# Altium PCB 400861.PcbDoc (part 2 of 7)
Units mm, origin at the board's own origin, x right, y up, seen from the top; angles counter-clockwise.
Board outline 145 x 63.5 mm, 8 copper layers (Top Side, Mid-Layer 1, Mid-Layer 2, Mid-Layer 3, Mid-Layer 4, Mid-Layer 5, Mid-Layer 6, Bottom Side), stack 1.529 mm thick; 287 components, 241 nets, 1164 pads, 3527 vias.
Unrouted connection lines stored in the file: 1.
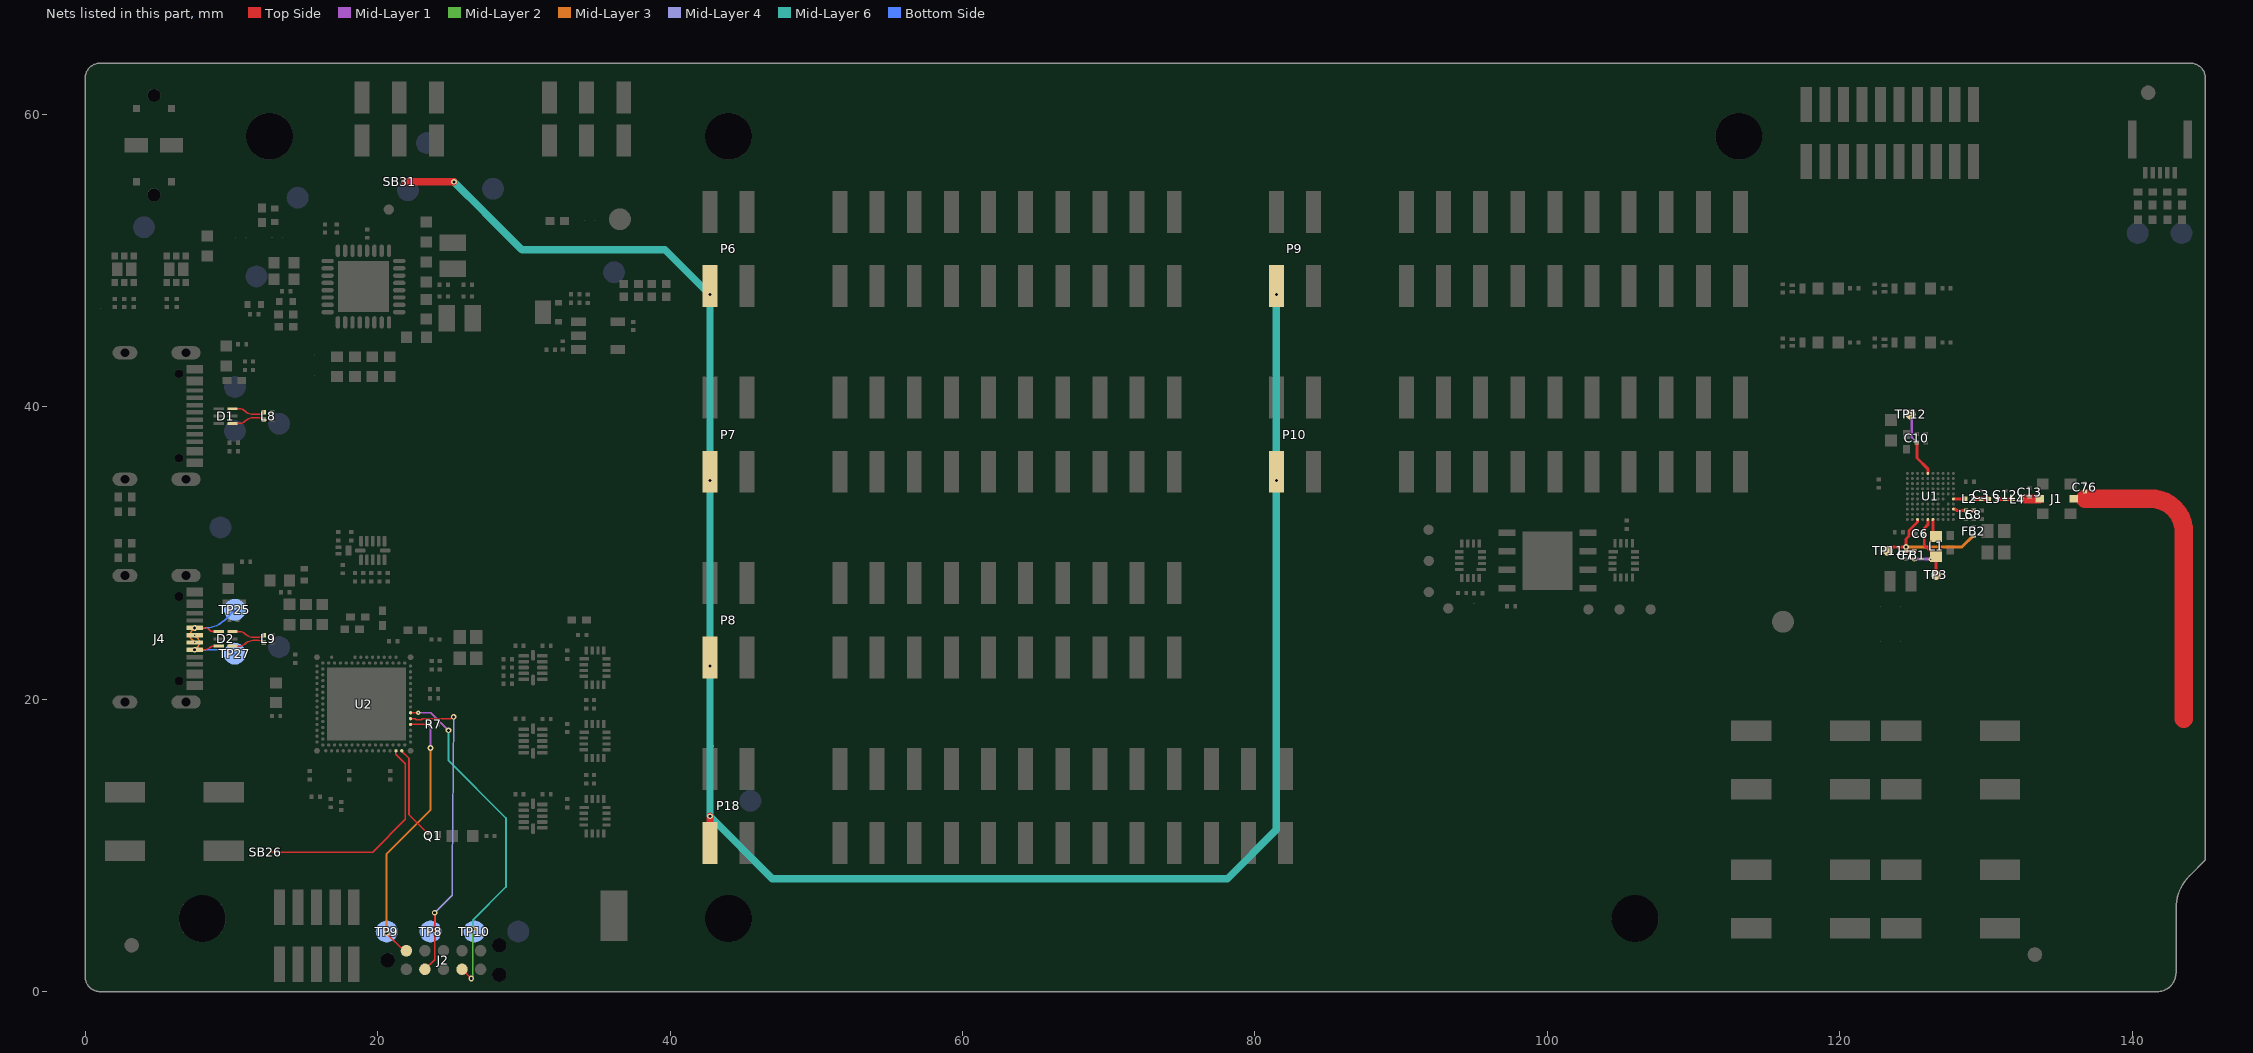
[diagram p8: the nets of this part, all layers, seen from the top]

## Footprints (in the part's own frame and the unit in brackets; to place one, negate y for a bottom-side part, rotate by r counter-clockwise, add the part's x,y. Pads: shape width x height; smd on the part's side, far side on the other; paste and mask are expansions set on the pad) (continued)
Solderbridge_Shorted_Power [mil]
  round 1 smd paste-99999: 1(-13.84,0.21) 2(13.72,0.21)
  Top Side region: -4.92,9.84 4.92,9.84 4.92,-9.84 -4.92,-9.84
  Top Side region: -7.54,19.57 -15.82,15.94 -21.61,9 -23.68,0.21 -23.68,0.21 -21.61,-8.59 -15.82,-15.53 -7.54,-19.16 -7.54,-19.16 -6.24,-19.11 -5.08,-18.51 -4.28,-17.47 -4,-16.2 -3.99,-16.2 -3.99,16.61 -4.28,17.89 -5.08,18.92 -6.24,19.52 -7.54,19.57
  Top Side region: 7.43,-19.16 15.71,-15.53 21.49,-8.59 23.56,0.21 23.56,0.21 21.49,9 15.71,15.94 7.43,19.57 7.43,19.57 6.12,19.52 4.96,18.92 4.16,17.89 3.88,16.61 3.88,16.61 3.88,-16.2 4.16,-17.47 4.96,-18.51 6.12,-19.11 7.43,-19.16
SON50P100X50-6N [mm] "SON, 6-Leads, Body 1,45x1,00mm, Pitch 0,50mm, IPC Medium Density"
  rect 0.7x0.2 smd: 1(-0.465,0.5) 2(-0.465,0) 3(-0.465,-0.5) 4(0.465,-0.5) 5(0.465,0) 6(0.465,0.5)
  silkscreen extent -0.95,-0.88 0.53,0.92, body extent -0.53,-0.75 0.53,0.75, height 0.5
SON127P600X80_HS-9N [mm] "SON, 8-Leads, Body 5.00x6.00mm, Pitch 1.27mm, Thermal Pad 4.00x3.40mm, IPC Medium Density"
  rect 1.15x0.45 smd: 1(-2.77,1.905) 2(-2.77,0.635) 3(-2.77,-0.635) 4(-2.77,-1.905) 5(2.77,-1.905) 6(2.77,-0.635) 7(2.77,0.635) 8(2.77,1.905)
  rect 3.4x4 smd paste-1.7: 9(0,0)
  silkscreen extent -3.98,-2.6 3.1,2.67, body extent -3.05,-2.55 3.05,2.55, height 0.8
SOT95P280X145-5N [mm] "SOT23, 5-Leads, Body 2,90x2,80mm, Pitch 0,95mm, IPC Medium Density"
  rect 1x0.6 smd: 1(-1.35,0.95) 2(-1.35,0) 3(-1.35,-0.95) 4(1.35,-0.95) 5(1.35,0.95)
  silkscreen extent -1.45,-1.5 0.45,1.72, body extent -1.5,-1.55 1.5,1.55, height 1.45
Switch-PB-6.2x6.3mm-SMD [mm] "6.2×6.5mm TACT Switch, without ground connector"
  rect 2.75x1.4 smd: 1(-3.375,2) 1(3.375,2) 2(-3.375,-2) 2(3.375,-2)
  silkscreen extent -3,-3 3,3, body extent -3.6,-3.1 3.6,3.1, height 2.5
TC2050-IDC-NLFP [mil]
  round 39 hole 39 unplated: 0(-150,0) 0(150,-40) 0(150,40)
  round 31 smd paste-196.85: 1(-100,-25) 2(-50,-25) 3(0,-25) 4(50,-25) 5(100,-25) 6(100,25) 7(50,25) 8(0,25) 9(-50,25) 10(-100,25)
  Top Side pour cut-out: -100,25 -100,-25 100,-25 100,25
TP_SMD_D0.7mm [mm] "Test point - pad 0.7mm"
  round 0.7 smd paste-5: 1(0,0)
TP_SMD_D1.5mm [mm] "Test point - pad 1.5mm"
  round 1.5 smd paste-5: 1(0,0)
  body extent -0.75,-0.75 0.75,0.75, height 0.05
WEE_3x4.5mm [mm]
  silkscreen extent -1.47,-2.7 1.47,1.71
XQFN40P180X260X50-16N [mm] "QFN, 16-Leads, Body 1.80x2.60mm, Pitch 0.40mm, IPC Medium Density"
  rect 0.65x0.22 smd paste-0.02 mask+0.05: 1(-0.725,0.6)
  rect 0.55x0.22 smd paste-0.02 mask+0.05: 2(-0.775,0.2) 3(-0.775,-0.2) 4(-0.775,-0.6) 9(0.775,-0.6) 10(0.775,-0.2) 11(0.775,0.2) 12(0.775,0.6)
  rect 0.22x0.55 smd paste-0.02 mask+0.05: 5(-0.6,-1.175) 6(-0.2,-1.175) 7(0.2,-1.175) 8(0.6,-1.175) 13(0.6,1.175) 14(0.2,1.175) 15(-0.2,1.175) 16(-0.6,1.175)
  silkscreen extent -1.36,1.12 -1.26,1.22, body extent -0.9,-1.3 0.9,1.3, height 0.55
XTAL_2012 [mm] "XTAL SMD 2.0 x 1.2 mm"
  rect 0.75x1.4 smd: 1(-0.725,0) 2(0.725,0)
  body extent -1,-0.61 1,0.61, height 0.6

## Part data
C1 C2 C5: library part C0201-100n-10V-X7R, "Capacitor, X7R, ±10%, 10V", Manufacturer=N.A., Part number NEMS=100200469, Artikkelnr Noca=N.A., Author=getr, Component Class=Capacitors, Component Status=Active, ComponentLink1Description=Datasheet, ComponentLink1URL=N.A., ComponentLink2Description="Supplier link", ComponentLink2URL=N.A., Footprint Doc=0201, HelpURL=N.A., LatestRevisionDate=2024-09-18, Manufacturer Part Number=N.A., Note=10V, Pad Count=2, Part Number=C0201-100n-10V-X7R, Part number IPS=N.A., Part number Norautron=N.A., PartId=100200469, Published=2021-04-12, Supplier 1=N.A., Supplier 2=N.A., Supplier Part Number 1=N.A., Supplier Part Number 2=N.A.
C3: library part C0201-1.2p-HQ-Murata, "Capacitor, NP0, ±0.05pF, 50V", Manufacturer=Murata, Manufacturer Part Number=GJM0335C1H1R2WB01D, Part number IPS=N.A., Part number NEMS=100200457, Supplier Part Number 1=490-GJM0335C1H1R2WB01DCT-ND, Artikkelnr Noca=N.A., Author=rsk, Component Class=Capacitors, Component Status=Active, ComponentLink1Description=Datasheet, ComponentLink1URL=https://search.murata.co.jp/Ceramy/image/img/A01X/G101/ENG/GJM0335C1H1R2WB01-01.pdf, ComponentLink2Description="Supplier link", ComponentLink2URL=https://www.murata.com/en-global/products/productdetail?partno=GJM0335C1H1R2WB01%23, Footprint Doc=0201, HelpURL=N.A., LatestRevisionDate=2020-12-16, Note=50V, Pad Count=2, Part Number=C0201-1.2p-HQ-Murata, Part number Norautron=N.A., PartId=100200457, Published=2020-12-16, Supplier 1=DigiKey, Supplier 2=Mouser, Supplier Part Number 2=81-GJM0335C1H1R2WB1D
C4: library part C0402-10µF-6.3V-X6S, "Capacitor, X6S, ±20%, 6.3V", Manufacturer=N.A., Part number NEMS=100200478, Artikkelnr Noca=N.A., Author=getr, Component Class=Capacitors, Component Status=Active, ComponentLink1Description=Datasheet, ComponentLink1URL=N.A., ComponentLink2Description="Supplier link", ComponentLink2URL=N.A., Footprint Doc=0402, HelpURL=N.A., LatestRevisionDate=2021-06-25, Manufacturer Part Number=N.A., Note=6.3V, Pad Count=2, Part Number=C0402-10µF-6.3V-X6S, Part number IPS=N.A., Part number Norautron=N.A., PartId=100200478, Published=2021-06-25, Supplier 1=N.A., Supplier 2=N.A., Supplier Part Number 1=N.A., Supplier Part Number 2=N.A.
C6: library part C0201-4.7µ-6V3-X5R-GRM035R60J475ME15J, "Capacitor, Ceramic, X5R, ±20%, 6.3V", Manufacturer=Murata, Manufacturer Part Number=GRM035R60J475ME15J, Part number IPS=N.A., Part number NEMS=100200685, Supplier Part Number 1=490-GRM035R60J475ME15JDKR-ND, Artikkelnr Noca=N.A., Author=rsk, Component Class=Capacitors, Component Status=Active, ComponentLink1Description=Datasheet, ComponentLink1URL=https://search.murata.co.jp/Ceramy/image/img/A01X/G101/ENG/GRM035R60J475ME15-01A.pdf, ComponentLink2Description="Supplier link", ComponentLink2URL=https://www.digikey.no/en/products/detail/murata-electronics/GRM035R60J475ME15J/10699045, Footprint Doc=0201, HelpURL=https://www.murata.com/en-eu/products/productdetail?partno=GRM035R60J475ME15J, LatestRevisionDate=2025-03-04, Note="-55°C ~ 85°C", Pad Count=2, Part Number=C0201-4.7µ-6V3-X5R-GRM035R60J475ME15J, Part number Norautron=N.A., PartId=100200685, Published=2025-03-04, Supplier 1=DigiKey, Supplier 2=Mouser, Supplier Part Number 2=81-GRM035R60J475ME5J
C7 C14: library part C0201-2µ2-2.5V-X6T-GRM033D80E225ME47D, "Capacitor, Ceramic, 2.2µF 2.5V X6T 0201,±20%", Manufacturer=Murata, Manufacturer Part Number=GRM033D80E225ME47D, Part number IPS=N.A., Part number NEMS=100200527, Supplier Part Number 1=81-GRM033D80E225ME7D, Artikkelnr Noca=N.A., Author=stl1, Component Class=Capacitors, Component Status=Active, ComponentLink1Description=Datasheet, ComponentLink1URL=https://www.murata.com/products/productdetail?partno=GRM033D80E225ME47%23, ComponentLink2Description="Supplier link", ComponentLink2URL=N.A., Footprint Doc=0201, HelpURL=N.A., LatestRevisionDate=2022-02-27, Note="2.5V, 20%, X6T", Pad Count=2, Part Number=C0201-2µ2-2.5V-X6T-GRM033D80E225ME47D, Part number Norautron=N.A., PartId=100200527, Published=2022-02-27, Supplier 1=Mouser, Supplier 2=DigiKey, Supplier Part Number 2=490-18653-1-ND
C8: library part C0201-1p0-25V-COG-GJM0335C1E1R0WB01, "CAP CER 1.0PF 25V C0G/NP0 0201", Manufacturer=Murata, Manufacturer Part Number=GJM0335C1E1R0WB01, Part number IPS=N.A., Part number NEMS=100200676, Supplier Part Number 1=490-10677-1-ND, Artikkelnr Noca=N.A., Author=masi, Component Class=Capacitors, Component Status=Active, ComponentLink1Description=Datasheet, ComponentLink1URL=https://search.murata.co.jp/Ceramy/image/img/A01X/G101/ENG/GJM0335C1E1R0WB01-01A.pdf, ComponentLink2Description="Supplier link", ComponentLink2URL=https://www.digikey.no/en/products/detail/murata-electronics/GRM0335C1E101JA01D/702426?s=N4IgTCBcDaICwE4AMBaAzARgGyqygcgCIgC6AvkA, Footprint Doc=0201, HelpURL=N.A., LatestRevisionDate=2024-10-17, Note=25V, Pad Count=2, Part Number=C0201-1p0-25V-COG-GJM0335C1E1R0WB01, Part number Norautron=N.A., PartId=100200676, Published=2024-10-17, Supplier 1=DigiKey, Supplier 2=Mouser, Supplier Part Number 2=81-GJM0335C1E1R0WB01
C10: library part C0201-2µ2-10V-X5R-GRM033R61A225KE47, "Capacitor, Ceramic, 2.2µF 10V X5R 0201,±10%", Manufacturer=Murata, Manufacturer Part Number=GRM033R61A225KE47D, Part number IPS=N.A., Part number NEMS=100200496, Supplier Part Number 1=81-GRM033R61A225KE7D, Artikkelnr Noca=N.A., Author=prbu, Component Class=Capacitors, Component Status=Active, ComponentLink1Description=Datasheet, ComponentLink1URL=https://www.murata.com/en-sg/products/productdetail?partno=GRM033R61A225KE47%23, ComponentLink2Description="Supplier link", ComponentLink2URL=https://www.mouser.com/ProductDetail/Murata-Electronics/GRM033R61A225KE47D?qs=I53XXhTNm8tqgHaFsI1bug%3D%3D, Footprint Doc=0201, HelpURL=N.A., LatestRevisionDate=2021-12-09, Note=10V, Pad Count=2, Part Number=C0201-2µ2-10V-X5R-GRM033R61A225KE47, Part number Norautron=N.A., PartId=100200496, Published=2021-12-09, Supplier 1=Mouser, Supplier 2=Digi-Key, Supplier Part Number 2=490-13227-1-ND
C11: library part C0402-4µ7-10V-X5R, "Capacitor, X5R, 10V", Manufacturer=Murata, Manufacturer Part Number=GRM155R61A475MEAAD, Part number IPS=N.A., Part number NEMS=100200415, Supplier Part Number 1=490-14306-1-ND, Artikkelnr Noca=N.A., Author=rsk, Component Class=Capacitors, Component Status=Active, ComponentLink1Description=Datasheet, ComponentLink1URL=http://search.murata.co.jp/Ceramy/image/img/A01X/G101/ENG/GRM155R61A475MEAA-01.pdf, ComponentLink2Description="Supplier link", ComponentLink2URL=https://www.digikey.com/product-detail/en/murata-electronics-north-america/GRM155R61A475MEAAD/490-14306-1-ND/6234742, Footprint Doc=0402, HelpURL=https://psearch.en.murata.com/capacitor/product/GRM155R61A475MEAA%23.html, LatestRevisionDate=2020-10-13, Note=10V, Pad Count=2, Part Number=C0402-4µ7-10V-X5R, Part number Norautron=N.A., PartId=100200415, Published=2018-10-04, Supplier 1=Digi-Key, Supplier 2=N.A., Supplier Part Number 2=N.A.
C12: library part C0201-1.5p-25V-NP0-GJM0335C1E1R5WB01, "Capacitor, NP0, ±0.05pF, 25V, High Q", Manufacturer=Murata, Manufacturer Part Number=GJM0335C1E1R5WB01, Part number IPS=N.A., Part number NEMS=100200477, Supplier Part Number 1=490-11176-2-ND, Artikkelnr Noca=N.A., Author=masi, Component Class=Capacitors, Component Status=Active, ComponentLink1Description=Datasheet, ComponentLink1URL=https://search.murata.co.jp/Ceramy/image/img/A01X/G101/ENG/GJM0335C1E1R5WB01-01.pdf, ComponentLink2Description="Supplier link", ComponentLink2URL=N.A., Footprint Doc=0201, HelpURL=https://www.murata.com/products/productdetail?partno=GJM0335C1E1R5WB01%23, LatestRevisionDate=2021-06-15, Note=25V, Pad Count=2, Part Number=C0201-1.5p-25V-NP0-GJM0335C1E1R5WB01, Part number Norautron=N.A., PartId=100200477, Published=2021-06-15, Supplier 1=DigiKey, Supplier 2=Mouser, Supplier Part Number 2=81-GJM0335C1E1R5WB1D
C13: library part C0201-0.3p-50V-GRM0335C1HR30BA01, "Capacitor, C0G, ±0.1pF, 50V", Manufacturer=Murata, Manufacturer Part Number=GRM0335C1HR30BA01, Part number IPS=N.A., Part number NEMS=100200650, Supplier Part Number 1=490-6135-2-ND, Artikkelnr Noca=N.A., Author=masi, Component Class=Capacitors, Component Status=Active, ComponentLink1Description=Datasheet, ComponentLink1URL=https://www.murata.com/en-global/products/productdetail?partno=GRM0335C1HR30BA01%23, ComponentLink2Description="Supplier link", ComponentLink2URL=N.A., Footprint Doc=0201, HelpURL=N.A., LatestRevisionDate=2024-01-10, Note=50V, Pad Count=2, Part Number=C0201-0.3p-50V-GRM0335C1HR30BA01, Part number Norautron=N.A., PartId=100200650, Published=2024-01-10, Supplier 1=DigiKey, Supplier 2=Mouser, Supplier Part Number 2=81-GRM0335C1HR30BA1D
C15 C16 C17 C21 C22 C23 C24 C28 C31 C35 C37 C47 C49 C54 C58 C63 C66 C69 C72 C77: library part C0201-100n, "Capacitor, X5R, ±10%, 100nF, 16V", Manufacturer=N.A., Part number IPS="00000001248, 00000002505", Part number NEMS=100200078, Part number Norautron=262071862, Artikkelnr Noca=N.A., Author=rsk, Component Class=Capacitors, Component Status=Active, ComponentLink1Description=Datasheet, ComponentLink1URL=N.A., ComponentLink2Description="Supplier link", ComponentLink2URL=N.A., Footprint Doc=0201, HelpURL=N.A., LatestRevisionDate=2024-06-27, Manufacturer Part Number=N.A., Note=16V, Pad Count=2, Part Number=C0201-100n, PartId=100200078, Published=2014-11-13, Supplier 1=N.A., Supplier 2=N.A., Supplier Part Number 1=N.A., Supplier Part Number 2=N.A.
C18 C19 C25 C32 C87: library part C0402-1µ0-6.3V-X5R-10%, "Capacitor, X5R, ±10%, 6.3V", Manufacturer=N.A., Part number NEMS=100200498, Part number Norautron=26207137, Artikkelnr Noca=N.A., Author=rubr, Component Class=Capacitors, Component Status=Active, ComponentLink1Description=Datasheet, ComponentLink1URL=N.A., ComponentLink2Description="Supplier link", ComponentLink2URL=N.A., Footprint Doc=0402, HelpURL=N.A., LatestRevisionDate=2022-01-27, Manufacturer Part Number=N.A., Note=6.3V, Pad Count=2, Part Number=C0402-1µ0-6.3V-X5R-10%, Part number IPS=N.A., PartId=100200498, Published=2022-01-27, Supplier 1=N.A., Supplier 2=N.A., Supplier Part Number 1=N.A., Supplier Part Number 2=N.A.
C20: library part C0201-2n2, "Capacitor, X7R, ±10%, 10V", Manufacturer=N.A., Part number IPS=00000001778, Part number NEMS=100200060, Part number Norautron=26470002, Artikkelnr Noca=N.A., Author=rsk, Component Class=Capacitors, Component Status=Active, ComponentLink1Description=Datasheet, ComponentLink1URL=N.A., ComponentLink2Description="Supplier link", ComponentLink2URL=N.A., Footprint Doc=0201, HelpURL=N.A., LatestRevisionDate=2014-11-13, Manufacturer Part Number=N.A., Note=10V, Pad Count=2, Part Number=C0201-2n2, PartId=100200060, Published=2014-11-13, Supplier 1=N.A., Supplier 2=N.A., Supplier Part Number 1=N.A., Supplier Part Number 2=N.A.
C26: library part C0603-2µ2-6.3V-X7R, "Capacitor, X7R, ±10%, 2.2µF, 6.3V", Manufacturer=N.A., Part number NEMS=100200272, Artikkelnr Noca=20039322, Author=rsk, Component Class=Capacitors, Component Status=Active, ComponentLink1Description=Datasheet, ComponentLink1URL=N.A., ComponentLink2Description="Supplier link", ComponentLink2URL=N.A., Footprint Doc=0603, HelpURL=N.A., LatestRevisionDate=2024-06-27, Manufacturer Part Number=N.A., Note=6.3V, Pad Count=2, Part Number=C0603-2µ2-6.3V-X7R, Part number IPS=N.A., Part number Norautron=N.A., PartId=100200272, Published=2009-05-08, Supplier 1=N.A., Supplier 2=N.A., Supplier Part Number 1=N.A., Supplier Part Number 2=N.A.
C27 C29: library part C0603-4µ7-10V-X7S, "Capacitor, X7S, ±10%, 10V", Manufacturer=N.A., Part number IPS=00000001779, Part number NEMS=100200351, Supplier Part Number 1=445-14258-1-ND, Artikkelnr Noca=20030013, Author=rsk, Component Class=Capacitors, Component Status=Active, ComponentLink1Description=Datasheet, ComponentLink1URL=N.A., ComponentLink2Description="Supplier link", ComponentLink2URL=N.A., Footprint Doc=0603, HelpURL=N.A., LatestRevisionDate=2016-08-15, Manufacturer Part Number=N.A., Note=10V, Pad Count=2, Part Number=C0603-4µ7-10V-X7S, Part number Norautron=N.A., PartId=100200351, Published=2016-08-15, Supplier 1=Digi-Key, Supplier 2=N.A., Supplier Part Number 2=N.A.
C30: library part C0603-4µ7-6.3V-X7R, "Capacitor, X7R, ±10%, 6.3V", Manufacturer="Samsung Electro-Mechanics America", Manufacturer Part Number=CL10B475KQ8NQNC, Part number IPS=00000002541, Part number NEMS=100200350, Part number Norautron=N.A., Supplier Part Number 1=1276-2087-1-ND, Artikkelnr Noca=20039473, Author=rsk, Component Class=Capacitors, Component Status=Active, ComponentLink1Description=Datasheet, ComponentLink1URL=N.A., ComponentLink2Description="Supplier link", ComponentLink2URL=N.A., Footprint Doc=0603, HelpURL=http://media.digikey.com/pdf/Data%20Sheets/Samsung%20PDFs/CL10B475KQ8NQNC_Spec.pdf, LatestRevisionDate=2015-06-10, Note=6.3V, Pad Count=2, Part Number=C0603-4µ7-6.3V-X7R, PartId=100200350, Published=2015-06-10, Supplier 1=Digi-Key, Supplier 2=N.A., Supplier Part Number 2=N.A.
C33 C50 C51 C52: library part C0603-10µ-10V-X5R, "Capacitor, Ceramic, X5R, ±20%, 10V", Manufacturer=N.A., Part number NEMS=100200481, Part number Norautron=262085341, Artikkelnr Noca=N.A., Author=rubr, Component Class=Capacitors, Component Status=Active, ComponentLink1Description=Datasheet, ComponentLink1URL=N.A., ComponentLink2Description="Supplier link", ComponentLink2URL=N.A., Footprint Doc=0603, HelpURL=N.A., LatestRevisionDate=2021-07-22, Manufacturer Part Number=N.A., Note=10V, Pad Count=2, Part Number=C0603-10µ-10V-X5R, Part number IPS=N.A., PartId=100200481, Published=2021-07-22, Supplier 1=N.A., Supplier 2=N.A., Supplier Part Number 1=N.A., Supplier Part Number 2=N.A.
C34 C36 C38: library part C0402-4µ7-10V-X5R-GRM155R61A475MEAAD, "Capacitor, X5R, ±20%, 10V", Manufacturer=Murata, Manufacturer Part Number=GRM155R61A475MEAA, Part number IPS=N.A., Part number NEMS="100200549, 100200415", Supplier Part Number 1=490-14306-1-ND, Artikkelnr Noca=N.A., Author=rubr, Component Class=Capacitors, Component Status=Active, ComponentLink1Description=Datasheet, ComponentLink1URL=https://search.murata.co.jp/Ceramy/image/img/A01X/G101/ENG/GRM155R61A475MEAA-01.pdf, ComponentLink2Description="Supplier link", ComponentLink2URL=N.A., Footprint Doc=0402, HelpURL=https://www.murata.com/en-us/products/productdetail?partno=GRM155R61A475MEAA%23, LatestRevisionDate=2023-03-22, Note=10V, Pad Count=2, Part Number=C0402-4µ7-10V-X5R-GRM155R61A475MEAAD, Part number Norautron=N.A., PartId=100200549, Published=2023-03-22, Supplier 1=Digi-Key, Supplier 2=N.A., Supplier Part Number 2=N.A.
C39: library part C0402-1µ0-10V-X5R, "Capacitor, Ceramic, X5R, ±10%, 10V", Manufacturer=N.A., Part number NEMS=100200482, Artikkelnr Noca=N.A., Author=rubr, Component Class=Capacitors, Component Status=Active, ComponentLink1Description=Datasheet, ComponentLink1URL=N.A., ComponentLink2Description="Supplier link", ComponentLink2URL=N.A., Footprint Doc=0402, HelpURL=N.A., LatestRevisionDate=2021-07-22, Manufacturer Part Number=N.A., Note=10V, Pad Count=2, Part Number=C0402-1µ0-10V-X5R, Part number IPS=N.A., Part number Norautron=N.A., PartId=100200482, Published=2021-07-22, Supplier 1=N.A., Supplier 2=N.A., Supplier Part Number 1=N.A., Supplier Part Number 2=N.A.
C40 C41 C44 C45 C46 C48: library part C0603-10µ-10V-X7T-GRM188D71A106MA73, "Capacitor, X7T, ±20%, 10V", Manufacturer=Murata, Manufacturer Part Number=GRM188D71A106MA73D, Part number IPS=00000004696, Part number NEMS=100200414, Part number Norautron=N.A., Supplier Part Number 1=490-7200-1-ND, Artikkelnr Noca=N.A., Author=rsk, Component Class=Capacitors, Component Status=Active, ComponentLink1Description=Datasheet, ComponentLink1URL=N.A., ComponentLink2Description="Supplier link", ComponentLink2URL=N.A., Footprint Doc=0603, HelpURL=https://no.mouser.com/datasheet/2/281/murata_03052018_GRM_Series_1-1310166.pdf, LatestRevisionDate=2021-07-22, Note=10VDC, Pad Count=2, Part Number=C0603-10µ-10V-X7T-GRM188D71A106MA73, PartId=100200414, Published=2018-09-11, Supplier 1=Digi-Key, Supplier 2=Mouser, Supplier Part Number 2=81-GRM188D71A106MA3D
C42 C43: library part C0201-1n0, "Capacitor, X7R, ±10%, 25V", Manufacturer=N.A., Part number IPS=00000003206, Part number NEMS=100200056, Artikkelnr Noca=N.A., Author=rsk, Component Class=Capacitors, Component Status=Active, ComponentLink1Description=Datasheet, ComponentLink1URL=N.A., ComponentLink2Description="Supplier link", ComponentLink2URL=N.A., Footprint Doc=0201, HelpURL=N.A., LatestRevisionDate=2020-10-13, Manufacturer Part Number=N.A., Note=16V, Pad Count=2, Part Number=C0201-1n0, Part number Norautron=N.A., PartId=100200056, Published=2014-11-13, Supplier 1=N.A., Supplier 2=N.A., Supplier Part Number 1=N.A., Supplier Part Number 2=N.A.
C55: library part C0603-4µ7-25V-X5R, "Capacitor, X5R, ±10%, 25V", Manufacturer=Murata, Manufacturer Part Number=GRM188R61E475KE11D, Part number IPS=N.A., Part number NEMS=100200352, Supplier Part Number 1=490-7203-1-ND, Artikkelnr Noca=N.A., Author=rsk, Component Class=Capacitors, Component Status=Active, ComponentLink1Description=Datasheet, ComponentLink1URL=https://www.murata.com/~/media/webrenewal/support/library/catalog/products/capacitor/mlcc/c02e.ashx?la=en-us, ComponentLink2Description="Supplier link", ComponentLink2URL=https://www.digikey.com/product-detail/en/murata-electronics-north-america/GRM188R61E475KE11D/490-7203-1-ND/3900450, Footprint Doc=0603, HelpURL=https://www.murata.com/~/media/webrenewal/support/library/catalog/products/capacitor/mlcc/c02e.ashx?la=en-us, LatestRevisionDate=2019-06-11, Note=25V, Pad Count=2, Part Number=C0603-4µ7-25V-X5R, Part number Norautron=N.A., PartId=100200352, Published=2019-06-11, Supplier 1=Digi-Key, Supplier 2=N.A., Supplier Part Number 2=N.A.
C56 C57: library part C0402-300p, "Capacitor, C0G, ±5%, 50V", Manufacturer=N.A., Part number IPS=00000007788, Part number NEMS=100200155, Supplier Part Number 1=490-3234-1-ND, Artikkelnr Noca=20020004, Author=rsk, Component Class=Capacitors, Component Status=Active, ComponentLink1Description=Datasheet, ComponentLink1URL=N.A., ComponentLink2Description="Supplier link", ComponentLink2URL=N.A., Footprint Doc=0402, HelpURL=N.A., LatestRevisionDate=2020-10-13, Manufacturer Part Number=N.A., Note=50V, Pad Count=2, Part Number=C0402-300p, Part number Norautron=N.A., PartId=100200155, Published=2015-05-29, Supplier 1=Digi-Key, Supplier 2=N.A., Supplier Part Number 2=N.A.
C59 C60 C61 C62 C78 C79 C80 C81 C82 C83 C84 C85 C86 C88 C89: library part C0201-100n, "Capacitor, X5R, ±10%", Manufacturer=N.A., Part number IPS="00000001248, 00000002505", Part number NEMS=100200078, Part number Norautron=262071862, Artikkelnr Noca=N.A., Author=rsk, Component Class=Capacitors, Component Status=Active, ComponentLink1Description=Datasheet, ComponentLink1URL=N.A., ComponentLink2Description="Supplier link", ComponentLink2URL=N.A., Footprint Doc=0201, HelpURL=N.A., LatestRevisionDate=2017-11-09, Manufacturer Part Number=N.A., Note=16V, Pad Count=2, Part Number=C0201-100n, PartId=100200078, Published=2014-11-13, Supplier 1=N.A., Supplier 2=N.A., Supplier Part Number 1=N.A., Supplier Part Number 2=N.A.
C64 C70: library part C0402-1µ0-16V-X5R, "Capacitor, Ceramic, X5R, ±10%, 16V", Manufacturer=Murata, Manufacturer Part Number=GRT155R61C105KE01D, Part number IPS=N.A., Part number NEMS=100200452, Supplier Part Number 1=490-12255-1-ND, Artikkelnr Noca=N.A., Author=rsk, Component Class=Capacitors, Component Status=Active, ComponentLink1Description=Datasheet, ComponentLink1URL=https://search.murata.co.jp/Ceramy/image/img/A01X/G101/ENG/GRT155R61C105KE01-01.pdf, ComponentLink2Description="Supplier link", ComponentLink2URL=https://www.murata.com/en-global/products/productdetail?partno=GRT155R61C105KE01%23, Footprint Doc=0402, HelpURL=N.A., LatestRevisionDate=2020-12-15, Note=16V, Pad Count=2, Part Number=C0402-1µ0-16V-X5R, Part number Norautron=N.A., PartId=100200452, Published=2020-12-15, Supplier 1=Digi-Key, Supplier 2=Mouser, Supplier Part Number 2=81-GRT155R61C105KE1D
C65 C71: library part C0201-10n, "Capacitor, X7R, ±10%, 10nF, 10V", Manufacturer=N.A., Part number IPS=00000003480, Part number NEMS=100200067, Part number Norautron=26621779, Artikkelnr Noca=N.A., Author=rsk, Component Class=Capacitors, Component Status=Active, ComponentLink1Description=Datasheet, ComponentLink1URL=N.A., ComponentLink2Description="Supplier link", ComponentLink2URL=N.A., Footprint Doc=0201, HelpURL=N.A., LatestRevisionDate=2024-06-27, Manufacturer Part Number=N.A., Note=10V, Pad Count=2, Part Number=C0201-10n, PartId=100200067, Published=2014-11-13, Supplier 1=N.A., Supplier 2=N.A., Supplier Part Number 1=N.A., Supplier Part Number 2=N.A.
C67 C68 C73 C74: library part C0402-10n, "Capacitor, X7R, ±10%", Manufacturer=N.A., Part number IPS=00000007784, Part number NEMS=100200173, Artikkelnr Noca=20039166, Author=rsk, Component Class=Capacitors, Component Status=Active, ComponentLink1Description=Datasheet, ComponentLink1URL=N.A., ComponentLink2Description="Supplier link", ComponentLink2URL=N.A., Footprint Doc=0402, HelpURL=N.A., LatestRevisionDate=2009-11-23, Manufacturer Part Number=N.A., Note=16V, Pad Count=2, Part Number=C0402-10n, Part number Norautron=N.A., PartId=100200173, Published=2009-05-08, Supplier 1=N.A., Supplier 2=N.A., Supplier Part Number 1=N.A., Supplier Part Number 2=N.A.
C76: library part C0201-1.0p_RF, "RF Chip Cap 0201", Manufacturer=N.A., Part number NEMS=100200085, Artikkelnr Noca=N.A., Author=rsk, Component Class=Capacitors, Component Status=Active, ComponentLink1Description=Datasheet, ComponentLink1URL=N.A., ComponentLink2Description="Supplier link", ComponentLink2URL=N.A., Footprint Doc=0201, HelpURL=N.A., LatestRevisionDate=2016-04-22, Manufacturer Part Number=N.A., Note="High frequency chip capasitors ±5%, NP0", Pad Count=2, Part Number=C0201-1.0p_RF, Part number IPS=N.A., Part number Norautron=N.A., PartId=100200085, Published=2016-04-22, Supplier 1=N.A., Supplier 2=N.A., Supplier Part Number 1=N.A., Supplier Part Number 2=N.A.
D1 D2: "TVS DIODE 5.5VWM 6XSON", Manufacturer=Nexperia, Part number IPS=N.A., Part number NEMS=101300202, Supplier Part Number 1=1727-4161-1-ND, Artikkelnr Noca=N.A., Author=rsk, Component Class=Semiconductors, Component Status=Active, ComponentLink1Description=Datasheet, ComponentLink1URL=https://assets.nexperia.com/documents/data-sheet/PRTR5V0U2F_PRTR5V0U2K.pdf, ComponentLink2Description="Supplier link", ComponentLink2URL=https://www.digikey.com/en/products/detail/nexperia-usa-inc/PRTR5V0U2F-115/1992982, Footprint Doc=SOT886, HelpURL=https://www.nexperia.com/products/esd-protection-tvs-filtering-and-signal-conditioning/automotive-esd-protection-and-tvs/automotive-esd-protection/PRTR5V0U2F.html, LatestRevisionDate=2023-02-19, Manufacturer Part Number=PRTR5V0U2F,115, Note=N.A., Pad Count=6, Part Number=PRTR5V0U2F,115, Part number Norautron=N.A., PartId=101300202, Published=2023-02-19, Supplier 1=DigiKey, Supplier 2=Mouser, Supplier Part Number 2=771-PRTR5V0U2F-T/R
FB1: library part FB0201-120R@100M-200mA-BLM03AG121SN1D, "Ferrite Bead, 120 Ohm @ 100MHz, 200mA, 500 mOhm Max", Manufacturer=Murata, Manufacturer Part Number=BLM03AG121SN1D, Part number IPS=N.A., Part number NEMS=100300419, Supplier Part Number 1=490-5622-1-ND, Artikkelnr Noca=N.A., Author=stl1, Component Class=Inductors, Component Status=Active, ComponentLink1Description=Datasheet, ComponentLink1URL=https://www.murata.com/en-eu/products/productdetail?partno=BLM03AG121SN1%23, ComponentLink2Description="Supplier link", ComponentLink2URL=N.A., Footprint Doc=0201, HelpURL=N.A., LatestRevisionDate=2022-02-27, Note="Ferrite Bead", Pad Count=2, Part Number=FB0201-120R@100M-200mA-BLM03AG121SN1D, Part number Norautron=N.A., PartId=100300419, Published=2022-02-27, Supplier 1=Digi-Key, Supplier 2=Mouser, Supplier Part Number 2=81-BLM03AX121SN1D
FB2: library part L0201-15n, "Inductor, 250mA, ±5%", Manufacturer=Murata, Manufacturer Part Number=LQP03TN15NJ02D, Part number IPS=N.A., Part number NEMS=100300032, Supplier Part Number 1=490-5570-1-ND, Artikkelnr Noca=N.A., Author=rsk, Component Class=Inductors, Component Status=Active, ComponentLink1Description=Datasheet, ComponentLink1URL=http://search.murata.co.jp/Ceramy/image/img/P02/JELF243C-0015.pdf, ComponentLink2Description="Supplier link", ComponentLink2URL=N.A., Footprint Doc=0201, HelpURL=N.A., LatestRevisionDate=2013-04-10, Note="High frequency chip inductor ±10%", Pad Count=2, Part Number=L0201-15n, Part number Norautron=N.A., PartId=100300032, Published=2013-04-10, Supplier 1=DigiKey, Supplier 2=N.A., Supplier Part Number 2=N.A.
FB3 FB4: library part FB0603-120R@100MHz-3000mA, "Ferrite Bead, 120 Ohm @ 100MHz, 3000mA, 30 mOhm Max", Manufacturer=Murata, Manufacturer Part Number=BLM18KG121TN1D, Part number IPS=N.A., Part number NEMS=100300103, Supplier Part Number 1=490-5254-1-ND, Artikkelnr Noca=N.A., Author=rsk, Component Class=Inductors, Component Status=Active, ComponentLink1Description=Datasheet, ComponentLink1URL=N.A., ComponentLink2Description="Supplier link", ComponentLink2URL=http://www.murata.com/en-global/products/productdata/8796733767710/S0580E.pdf, Footprint Doc=0603, HelpURL=http://www.murata.com/en-global/products/productdata/8796733767710/S0580E.pdf, LatestRevisionDate=2017-08-15, Note="Chip EMIFIL Inductor Type Chip Ferrite Bead", Pad Count=2, Part Number=FB0603-120R@100MHz-3000mA, Part number Norautron=N.A., PartId=100300103, Published=2017-08-15, Supplier 1=Digi-Key, Supplier 2=N.A., Supplier Part Number 2=N.A.
FB5: library part FB0402-120R@100MHz-1200mA-BLM15EX121SN1_C2, "Ferrite Bead, 120 Ohm @ 100MHz, 1200mA, 75 mOhm Max", Manufacturer=Murata, Manufacturer Part Number=BLM15EX121SN1, Part number IPS=N.A., Part number NEMS="100300431, 100300416", Supplier Part Number 1=490-16509-1-ND, Artikkelnr Noca=N.A., Author=rubr, Component Class=Inductors, Component Status=Active, ComponentLink1Description=Datasheet, ComponentLink1URL=https://www.murata.com/en-us/products/productdata/8796750970910/ENFA0023.pdf, ComponentLink2Description="Supplier link", ComponentLink2URL=N.A., Footprint Doc=0402, HelpURL=https://www.murata.com/en-us/products/productdetail?partno=BLM15EX121SN1%23, LatestRevisionDate=2023-03-22, Note=N.A., Pad Count=2, Part Number=FB0402-120R@100MHz-1200mA-BLM15EX121SN1_C2, Part number Norautron=N.A., PartId=100300431, Published=2023-03-22, Supplier 1=Digi-Key, Supplier 2=Mouser, Supplier Part Number 2=81-BLM15EX121SN1D
Fid1 Fid2 Fid3: library part Fid-Mark, "Fiducial Mark", Manufacturer=N.A., Part number NEMS=100500073, Artikkelnr Noca=N.A., Author=rsk, Component Class=Connectors, Component Status=Active, ComponentLink1Description=Datasheet, ComponentLink1URL=N.A., ComponentLink2Description="Supplier link", ComponentLink2URL=N.A., Footprint Doc=Fiducial, HelpURL=N.A., LatestRevisionDate=2009-12-12, Manufacturer Part Number=N.A., Note=N.A., Pad Count=1, Part Number=Fid-Mark, Part number IPS=N.A., Part number Norautron=N.A., PartId=100500073, Published=2009-12-12, Supplier 1=N.A., Supplier 2=N.A., Supplier Part Number 1=N.A., Supplier Part Number 2=N.A., System=Connector
H1 H2 H3 H4 H5 H6: library part MountingHole_3.2_M3, "Mounting hole, 3.2mm, M3, no annular", Manufacturer=N.A., Part number NEMS=101200008, Artikkelnr Noca=N.A., Author=kod1, Component Class=Mechanicals, Component Status=Active, ComponentLink1Description=Datasheet, ComponentLink1URL=N.A., ComponentLink2Description="Supplier link", ComponentLink2URL=N.A., Footprint Doc=MountingHole_3.2_M3, HelpURL=N.A., LatestRevisionDate=2022-12-16, Manufacturer Part Number=N.A., Note=N.A., Pad Count=0, Part Number=MountingHole_3.2_M3, Part number IPS=N.A., Part number Norautron=N.A., PartId=101200008, Published=2022-12-16, Rule="Clearance Constraint [Generic clearance = 0.254mm, and 9 value(s) for objects]", Supplier 1=N.A., Supplier 2=N.A., Supplier Part Number 1=N.A., Supplier Part Number 2=N.A.
J1: "Coaxial Connector with Switch", Manufacturer=Murata, Part number IPS=00000009955, Part number NEMS=100500400, Part number Norautron=26030338, Supplier Part Number 1=490-4981-1-ND, Artikkelnr Noca=55029011, Author=rsk, Component Class=Connectors, Component Status=Active, ComponentLink1Description=Datasheet, ComponentLink1URL=N.A., ComponentLink2Description="Supplier link", ComponentLink2URL=N.A., Footprint Doc=COAXIAL-SWF, HelpURL=http://www.murata.com/products/catalog/pdf/o33e.pdf, LatestRevisionDate=2014-04-24, Manufacturer Part Number=MM8130-2600, Note=N.A., Pad Count=3, Part Number=MM8130-2600, PartId=100500400, Published=2014-04-24, Supplier 1=Digi-Key, Supplier 2=Mouser, Supplier Part Number 2=81-MM8130-2600RA2, System=Connector
J2: library part TC2050-IDC-NLFP, "CBL PLUG-OF-NAILS 10-PIN", Manufacturer="Tag-Connect LLC", Part number IPS=N.A., Part number NEMS=100500463, Supplier Part Number 1=TC2050-IDC-NL-ND, Artikkelnr Noca=N.A., Author=rsk, Component Class=Connectors, Component Status=Active, ComponentLink1Description=Datasheet, ComponentLink1URL=N.A., ComponentLink2Description="Supplier link", ComponentLink2URL=N.A., Footprint Doc=TC2050-IDC-NLFP, HelpURL=http://www.tag-connect.com/Materials/TC2050-IDC%20Datasheet.pdf, LatestRevisionDate=2012-11-21, Manufacturer Part Number=TC2050-IDC-NLFP, Note=N.A., Pad Count=10, Part Number=TC2050-IDC-NLFP, Part number Norautron=N.A., PartId=100500463, Published=2012-11-21, Supplier 1=Digi-Key, Supplier 2=N.A., Supplier Part Number 2=N.A., System=Connector
J3 J4: library part 80259-1021, "USB-C Receptacle, 16 Pin, USB 2.0", Manufacturer="Bellweather Electronic Corp.", Part number IPS=N.A., Part number NEMS=100500830, Artikkelnr Noca=N.A., Author=getr, Component Class=Connectors, Component Status=Active, ComponentLink1Description=Datasheet, ComponentLink1URL=\\hizz\pro\app9717\Datasheet\connectors\Bellwether\SD-80259-001_C.pdf, ComponentLink2Description="Supplier link", ComponentLink2URL=N.A., Footprint Doc=SD-80259-001, HelpURL=N.A., LatestRevisionDate=2024-03-26, Manufacturer Part Number=80259-1021, Note=N.A., Pad Count=16, Part Number=80259-1021, Part number Norautron=N.A., PartId=100500830, Published=2023-10-30, Supplier 1=Cabcon, Supplier 2=N.A., Supplier Part Number 1=80259-1021, Supplier Part Number 2=N.A., System=Connector
J5: library part FPC_05P-0.5mm-RA-SMD, "0.5mm FPC, 5P,Right Angle SMT,Double Contact,H=1.2mm,White, Tin plated", Manufacturer=WCON, Manufacturer Part Number=5141-05RZDNWR03, Part number IPS=N.A., Part number NEMS=100500528, Artikkelnr Noca=N.A., Author=rsk, Component Class=Connectors, Component Status=Active, ComponentLink1Description=Datasheet, ComponentLink1URL=N.A., ComponentLink2Description="Supplier link", ComponentLink2URL=N.A., Footprint Doc=FPC_05P-0.5mm-RA-SMD, HelpURL=\\hizz\pro\app9717\Datasheet\connectors\W-CON\5141-05RZDNXX02.pdf, LatestRevisionDate=2024-02-02, Note="(Replaced 5141-05RZDNWR02)", Pad Count=7, Part Number=FPC_05P-0.5mm-RA-SMD, Part number Norautron=N.A., PartId=100500528, Published=2015-06-22, Supplier 1=Cabcon, Supplier 2=N.A., Supplier Part Number 1=5141-05RZDNWR03, Supplier Part Number 2=N.A., System=Connector
JP1: library part "SHUNT JUMPER 2.54mm Black Vertical", "Shunt Jumper 2.54mm Black, open top", Manufacturer=WCON, Manufacturer Part Number=3710-6001OS0B05, Part number IPS=N.A., Part number NEMS=100500728, Artikkelnr Noca=N.A., Author=masi, Component Class=Connectors, Component Status=Active, ComponentLink1Description=Datasheet, ComponentLink1URL=N.A., ComponentLink2Description="Supplier link", ComponentLink2URL=N.A., Footprint Doc="SHUNT JUMPER 2.54mm", HelpURL=N.A., LatestRevisionDate=2024-08-02, Note=N.A., Pad Count=2, Part Number="SHUNT JUMPER 2.54mm Black Vertical", Part number Norautron=N.A., PartId=100500752, Published=2022-07-01, Supplier 1=Cabcon, Supplier 2=N.A., Supplier Part Number 1=3710-6001OS0B05, Supplier Part Number 2=N.A., System=Connector
L1: library part L0603-4µ7-MLZ1608M4R7WT000, "Inductor, 120mA, ±20%, 0.65R", Manufacturer="TDK Corporation", Manufacturer Part Number=MLZ1608M4R7WT000, Part number IPS=N.A., Part number NEMS=100300440, Supplier Part Number 1=445-6390-2-ND, Artikkelnr Noca=N.A., Author=stl1, Component Class=Inductors, Component Status=Active, ComponentLink1Description=Datasheet, ComponentLink1URL=https://product.tdk.com/en/search/inductor/inductor/smd/info?part_no=MLZ1608M4R7WT000, ComponentLink2Description="Supplier link", ComponentLink2URL=N.A., Footprint Doc=0603, HelpURL=N.A., LatestRevisionDate=2023-05-10, Note="Power Inductor ±20%", Pad Count=2, Part Number=L0603-4µ7-MLZ1608M4R7WT000, Part number Norautron=N.A., PartId=100300440, Published=2023-05-10, Supplier 1=Digi-Key, Supplier 2=Mouser, Supplier Part Number 2=810-MLZ1608M4R7WT000
L2: library part L0201-3n6-HQ-Murata, "Inductor, 500mA, ±0.1ｎH, 170mOhm", Manufacturer=Murata, Manufacturer Part Number=LQP03HQ3N6B02, Part number IPS=N.A., Part number NEMS=100300223, Supplier Part Number 1=490-13927-1-ND, Artikkelnr Noca=N.A., Author=rsk, Component Class=Inductors, Component Status=Active, ComponentLink1Description=Datasheet, ComponentLink1URL=https://search.murata.co.jp/Ceramy/image/img/P02/JELF243C-0021.pdf, ComponentLink2Description="Supplier link", ComponentLink2URL=N.A., Footprint Doc=0201, HelpURL=https://psearch.en.murata.com/inductor/product/LQP03HQ3N6B02%23.html, LatestRevisionDate=2018-10-23, Note="-55°C ~ 125°C", Pad Count=2, Part Number=L0201-3n6-HQ-Murata, Part number Norautron=N.A., PartId=100300223, Published=2018-10-23, Supplier 1=DigiKey, Supplier 2=N.A., Supplier Part Number 2=N.A.
L3: library part L0201-4n7-HQ-Murata, "Inductor, 400mA, ±3%, 250mOhm", Manufacturer=Murata, Manufacturer Part Number=LQP03HQ4N7H02, Part number IPS=N.A., Part number NEMS=100300231, Supplier Part Number 1=490-13943-1-ND, Artikkelnr Noca=N.A., Author=rsk, Component Class=Inductors, Component Status=Active, ComponentLink1Description=Datasheet, ComponentLink1URL=https://search.murata.co.jp/Ceramy/image/img/P02/JELF243C-0021.pdf, ComponentLink2Description="Supplier link", ComponentLink2URL=N.A., Footprint Doc=0201, HelpURL=https://psearch.en.murata.com/inductor/product/LQP03HQ4N7H02%23.html, LatestRevisionDate=2018-10-23, Note="-55°C ~ 125°C", Pad Count=2, Part Number=L0201-4n7-HQ-Murata, Part number Norautron=N.A., PartId=100300231, Published=2018-10-23, Supplier 1=DigiKey, Supplier 2=N.A., Supplier Part Number 2=N.A.
L4: library part L0201-3n3-HQ-Murata, "Inductor, 500mA, ±0.1ｎH, 170mOhm", Manufacturer=Murata, Manufacturer Part Number=LQP03HQ3N3B02, Part number IPS=N.A., Part number NEMS=100300220, Supplier Part Number 1=490-13921-1-ND, Artikkelnr Noca=N.A., Author=rsk, Component Class=Inductors, Component Status=Active, ComponentLink1Description=Datasheet, ComponentLink1URL=https://search.murata.co.jp/Ceramy/image/img/P02/JELF243C-0021.pdf, ComponentLink2Description="Supplier link", ComponentLink2URL=N.A., Footprint Doc=0201, HelpURL=https://psearch.en.murata.com/inductor/product/LQP03HQ3N3B02%23.html, LatestRevisionDate=2018-10-23, Note="-55°C ~ 125°C", Pad Count=2, Part Number=L0201-3n3-HQ-Murata, Part number Norautron=N.A., PartId=100300220, Published=2018-10-23, Supplier 1=DigiKey, Supplier 2=N.A., Supplier Part Number 2=N.A.
L5: library part L0201-1n0, "Inductor, 750mA, ±0.2nH", Manufacturer=Murata, Manufacturer Part Number=LQP03TN1N0C02D, Part number IPS=N.A., Part number NEMS=100300012, Supplier Part Number 1=490-5546-1-ND, Artikkelnr Noca=N.A., Author=rsk, Component Class=Inductors, Component Status=Active, ComponentLink1Description=Datasheet, ComponentLink1URL=http://search.murata.co.jp/Ceramy/image/img/P02/JELF243C-0015.pdf, ComponentLink2Description="Supplier link", ComponentLink2URL=N.A., Footprint Doc=0201, HelpURL=N.A., LatestRevisionDate=2013-04-10, Note="High frequency chip inductor ±5%", Pad Count=2, Part Number=L0201-1n0, Part number Norautron=N.A., PartId=100300012, Published=2013-04-10, Supplier 1=DigiKey, Supplier 2=N.A., Supplier Part Number 2=N.A.
L6 L7: library part L0806-2µ2-2500mA-73mOhm-CIGT201610EH2R2MNE, "Inductor, Irms=2.5A, Isat=2.9A, ±20%, DCR=73mΩ", Manufacturer="Samsung Electro-Mechanics America", Manufacturer Part Number=CIGT201610EH2R2MNE, Part number IPS=N.A., Part number NEMS=100300400, Part number Norautron=26521789, Supplier Part Number 1=1276-6901-1-ND, Artikkelnr Noca=N.A., Author=rsk, Component Class=Inductors, Component Status=Active, ComponentLink1Description=Datasheet, ComponentLink1URL=https://media.digikey.com/pdf/Data%20Sheets/Samsung%20PDFs/CIGT201610EH2R2MNE_Spec.pdf, ComponentLink2Description="Supplier link", ComponentLink2URL=https://www.digikey.com/en/products/detail/samsung-electro-mechanics/CIGT201610EH2R2MNE/7041223?s=N4IgTCBcDaIMIEkDiAVMAGAjANk%2BgogBJgBKYAsgHL4gC6AvkA, Footprint Doc=0806, HelpURL=http://product.samsungsem.com/pi/CIGT201610EH2R2MN.do, LatestRevisionDate=2022-09-07, Note="Unshielded Thin Film Inductor", Pad Count=2, Part Number=L0806-2µ2-2500mA-73mOhm-CIGT201610EH2R2MNE, PartId=100300400, Published=2021-02-03, Supplier 1=Digi-Key, Supplier 2=Mouser, Supplier Part Number 2=187-CIGT201610EH2R2M
L8 L9: "2 Line Common Mode Choke, 90Ohm @ 100MHz, Imax=100mA, DCR=4Ohm, VDC=5V,  -40°C ~ 85°C", Manufacturer="Murata Electronics", Part number IPS=N.A., Part number NEMS=100300513, Supplier Part Number 1=490-DLM0NSM900HY2DCT-ND, Artikkelnr Noca=N.A., Author=rubr, Component Class=Inductors, Component Status=Active, ComponentLink1Description=Datasheet, ComponentLink1URL=https://www.murata.com/en-global/products/productdata/8799424610334/EFLD0009.pdf, ComponentLink2Description="Supplier link", ComponentLink2URL=https://www.digikey.com/en/products/detail/murata-electronics/DLM0NSM900HY2D/11685874, Footprint Doc=CMC0806X05N, HelpURL=https://pim.murata.com/en-sg/pim/details/?partNum=DLM0NSM900HY2%23, LatestRevisionDate=2025-09-01, Manufacturer Part Number=DLM0NSM900HY2D, Note=N.A., Pad Count=4, Part Number=DLM0NSM900HY2D, Part number Norautron=N.A., PartId=100300513, Published=2025-09-01, Supplier 1=DigiKey, Supplier 2=N.A., Supplier Part Number 2=N.A.
LABEL1: library part Label_12x12, "PCA version label, stick-on, 12x12mm", Manufacturer="Ellco Etikett", Manufacturer Part Number=A33512‐01, Part number IPS=N.A., Part number NEMS=101200028, Artikkelnr Noca=N.A., Author=hany, Component Class=Mechanicals, Component Status=Active, ComponentLink1Description=Datasheet, ComponentLink1URL=N.A., ComponentLink2Description="Supplier link", ComponentLink2URL=N.A., Footprint Doc=Label, HelpURL=N.A., LatestRevisionDate=2023-01-05, Note=N.A., Pad Count=0, Part Number=Label_12x12, Part number Norautron=N.A., PartId=101200028, Published=2023-01-05, Supplier 1=N.A., Supplier 2=N.A., Supplier Part Number 1=N.A., Supplier Part Number 2=N.A.
LD1 LD2 LD3 LD4 LD5: library part "VS 25C7M5", "LED, Green, 0603, 573nm, Vf=2.0V, 24mcd, - 40 to +85°C", Manufacturer="Victory Electronics", Part number IPS="00000001274, 00000009961", Part number NEMS=101400097, Part number Norautron=26313411, Supplier Part Number 1=N.A., Artikkelnr Noca=13019193, Author=rsk, Component Class=Optoelectronics, Component Status=Active, ComponentLink1Description=Datasheet, ComponentLink1URL=N.A., ComponentLink2Description="Supplier link", ComponentLink2URL=N.A., Footprint Doc=0603, HelpURL="\\hizz\pro\app9717\Datasheet\optoelectronics\Victory Electronics\VS 25C7M5.pdf", LatestRevisionDate=2020-10-23, Manufacturer Part Number="VS 25C7M5", Note=N.A., Pad Count=2, Part Number="VS 25C7M5", PartId=101400097, Published=2017-08-21, Supplier 1="EC Partner", Supplier 2=N.A., Supplier Part Number 2=N.A.
LOGO1: library part "WEEE Symbol 3x4.5mm", "WEEE Directive symbol", Manufacturer=N.A., Part number NEMS=101100006, Artikkelnr Noca=N.A., Author=rsk, Component Class=Markings, Component Status=Active, ComponentLink1Description=Datasheet, ComponentLink1URL=N.A., ComponentLink2Description="Supplier link", ComponentLink2URL=N.A., Footprint Doc=WEE_3x4.5mm, HelpURL=N.A., LatestRevisionDate=2023-03-07, Manufacturer Part Number=N.A., Note=N.A., Pad Count=0, Part Number="WEEE Symbol 3x4.5mm", Part number IPS=N.A., Part number Norautron=N.A., PartId=101100006, Published=2016-09-07, Supplier 1=N.A., Supplier 2=N.A., Supplier Part Number 1=N.A., Supplier Part Number 2=N.A.
LOGO3: "Segger logo, small size", Manufacturer=N.A., Part number NEMS=101100004, Artikkelnr Noca=N.A., Author=rsk, Component Class=Markings, Component Status=Active, ComponentLink1Description=Datasheet, ComponentLink1URL=N.A., ComponentLink2Description="Supplier link", ComponentLink2URL=N.A., Footprint Doc="Segger Logo S", HelpURL=N.A., LatestRevisionDate=2016-09-07, Manufacturer Part Number=N.A., Note=N.A., Pad Count=0, Part Number="Segger Logo S", Part number IPS=N.A., Part number Norautron=N.A., PartId=101100004, Published=2016-09-07, Supplier 1=N.A., Supplier 2=N.A., Supplier Part Number 1=N.A., Supplier Part Number 2=N.A.
P1 P2 P3 P4 P5: library part "Pin Header 2x10 SMD, 2.54mm", "Pin Header 2x10, 2.54mm (100mil) SMD", Manufacturer=WCON, Manufacturer Part Number=1125-1210S0M116CR09, Part number IPS=N.A., Part number NEMS=100500738, Artikkelnr Noca=N.A., Author=stl1, Component Class=Connectors, Component Status=Active, ComponentLink1Description=Datasheet, ComponentLink1URL=https://suddendocs.samtec.com/catalog_english/tsm.pdf, ComponentLink2Description="Supplier link", ComponentLink2URL=https://www.digikey.no/en/products/detail/samtec-inc/TSM-110-02-S-DV/6679037, Footprint Doc=HDR_2x10-SMD-2.54MM, HelpURL=https://www.samtec.com/products/tsm-110-02-s-dv, LatestRevisionDate=2024-02-21, Note=SMD, Pad Count=20, Part Number="Pin Header 2x10 SMD, 2.54mm", Part number Norautron=N.A., PartId=100500738, Published=2022-01-24, Supplier 1=Cabcon, Supplier 2=Samtec, Supplier Part Number 1=1125-1210S0M116CR09, Supplier Part Number 2=TSM-110-01-S-DV, System=Connector
P6 P7 P8 P9 P10 P18: "Pin Header 2x2, SMD, 2.54mm (100mil)", Manufacturer=WCON, Manufacturer Part Number=1125-1202S0M116CR03, Part number IPS=N.A., Part number NEMS=100500770, Artikkelnr Noca=N.A., Author=stl1, Component Class=Connectors, Component Status=Active, ComponentLink1Description=Datasheet, ComponentLink1URL=N.A., ComponentLink2Description="Supplier link", ComponentLink2URL=N.A., Footprint Doc=HDR_2x2-SMD, HelpURL=N.A., LatestRevisionDate=2024-02-21, Note=N.A., Pad Count=4, Part Number="Pin Header 2x2 SMD", Part number Norautron=N.A., PartId=100500770, Published=2022-10-28, Supplier 1=Cabcon, Supplier 2=Samtec, Supplier Part Number 1=1125-1202S0M116CR03, Supplier Part Number 2=TSM-102-01-S-DV, System=Connector
P11 P13: library part "Pin Header 2x5 SMD, 1.27mm, KS", "Pin Header 2x5, 1.27mm (50mil), SMD, Keying Shroud", Manufacturer=WCON, Manufacturer Part Number=3132-10MS0BK00R5, Part number IPS=N.A., Part number NEMS=100500261, Artikkelnr Noca=N.A., Author=rsk, Component Class=Connectors, Component Status=Active, ComponentLink1Description=Datasheet, ComponentLink1URL=N.A., ComponentLink2Description="Supplier link", ComponentLink2URL=N.A., Footprint Doc=HDR_2x5-SMD-1.27mm, HelpURL=\\hizz\pro\app9717\Datasheet\connectors\W-CON\3132-XXMXXBK00XX.pdf, LatestRevisionDate=2024-02-02, Note="(Replaced 3132-10MS0BK00R1)", Pad Count=10, Part Number="Pin Header 2x5 SMD, 1.27mm, KS", Part number Norautron=N.A., PartId=100500261, Published=2016-01-22, Supplier 1=Cabcon, Supplier 2=N.A., Supplier Part Number 1=3132-10MS0BK00R5, Supplier Part Number 2=N.A., System=Connector
  P11: Assembly="Not mounted"
P12: library part "Pin Header 2x10 SMD, 1.27mm, KS, N.C.", "Pin Header 2x10, 1.27mm (50mil), SMD, Keying Shroud", Manufacturer=WCON, Manufacturer Part Number=3132-20MS0BK00R1, Part number IPS=N.A., Part number NEMS=100500279, Artikkelnr Noca=N.A., Assembly="Not mounted", Author=rsk, Component Class=Connectors, Component Status=Active, ComponentLink1Description=Datasheet, ComponentLink1URL=N.A., ComponentLink2Description="Supplier link", ComponentLink2URL=N.A., Footprint Doc=HDR_2x10-SMD-1.27mm, HelpURL=N.A., LatestRevisionDate=2017-10-23, Note=N.A., Pad Count=20, Part Number="Pin Header 2x10 SMD, 1.27mm, KS, N.C.", Part number Norautron=N.A., PartId=100500279, Published=2017-09-07, Supplier 1=Cabcon, Supplier 2=Digi-Key, Supplier Part Number 1=3132-20MS0BK00R1, Supplier Part Number 2=FTSH-110-01-F-DV-K-ND, System=Connector
P14 P16: library part "Pin List 1x3 SMD", "Pin List 1x3, 2.54mm (100mil), SMD", Manufacturer=WCON, Manufacturer Part Number=1125-1103S0M116CR04, Part number IPS=N.A., Part number NEMS=100500306, Part number Norautron=26470016, Artikkelnr Noca=N.A., Author=rsk, Component Class=Connectors, Component Status=Active, ComponentLink1Description=Datasheet, ComponentLink1URL=N.A., ComponentLink2Description="Supplier link", ComponentLink2URL=N.A., Footprint Doc=LIST_1x3_SMD, HelpURL=N.A., LatestRevisionDate=2021-09-24, Note=N.A., Pad Count=3, Part Number="Pin List 1x3 SMD", PartId=100500306, Published=2013-10-21, Supplier 1=Cabcon, Supplier 2=Samtec, Supplier Part Number 1=1125-1103S0M116CR04, Supplier Part Number 2=TSM-103-01-L-SV-P-TR, System=Connector
P17: library part "Pin Header 2x13 SMD, 2.54mm", "Pin Header 2x13, 2.54mm (100mil) SMD", Manufacturer=WCON, Manufacturer Part Number=1125-1213S0M116CR09, Part number IPS=N.A., Part number NEMS=100500908, Artikkelnr Noca=N.A., Author=getr, Component Class=Connectors, Component Status=Active, ComponentLink1Description=Datasheet, ComponentLink1URL=https://suddendocs.samtec.com/catalog_english/tsm.pdf, ComponentLink2Description="Supplier link", ComponentLink2URL=https://www.digikey.no/no/products/detail/samtec-inc/tsm-113-01-s-dv/6679042, Footprint Doc=HDR_2x13-SMD-2.54MM, HelpURL=https://www.samtec.com/products/tsm-113-01-s-dv, LatestRevisionDate=2025-05-25, Note=SMD, Pad Count=26, Part Number="Pin Header 2x13 SMD, 2.54mm", Part number Norautron=N.A., PartId=100500908, Published=2025-05-25, Supplier 1=Cabcon, Supplier 2=Samtec, Supplier Part Number 1=1125-1213S0M116CR09, Supplier Part Number 2=TSM-113-01-S-DV, System=Connector